# Altium PCB Copy of CAN_ESP.PcbDoc (part 1 of 2)
Units mm, origin at the board's own origin, x right, y up, seen from the top; angles counter-clockwise.
Board outline 43.47 x 32.7 mm, 2 copper layers (Top Layer, Bottom Layer), stack 1.1 mm thick; 66 components, 64 nets, 253 pads, 221 vias.
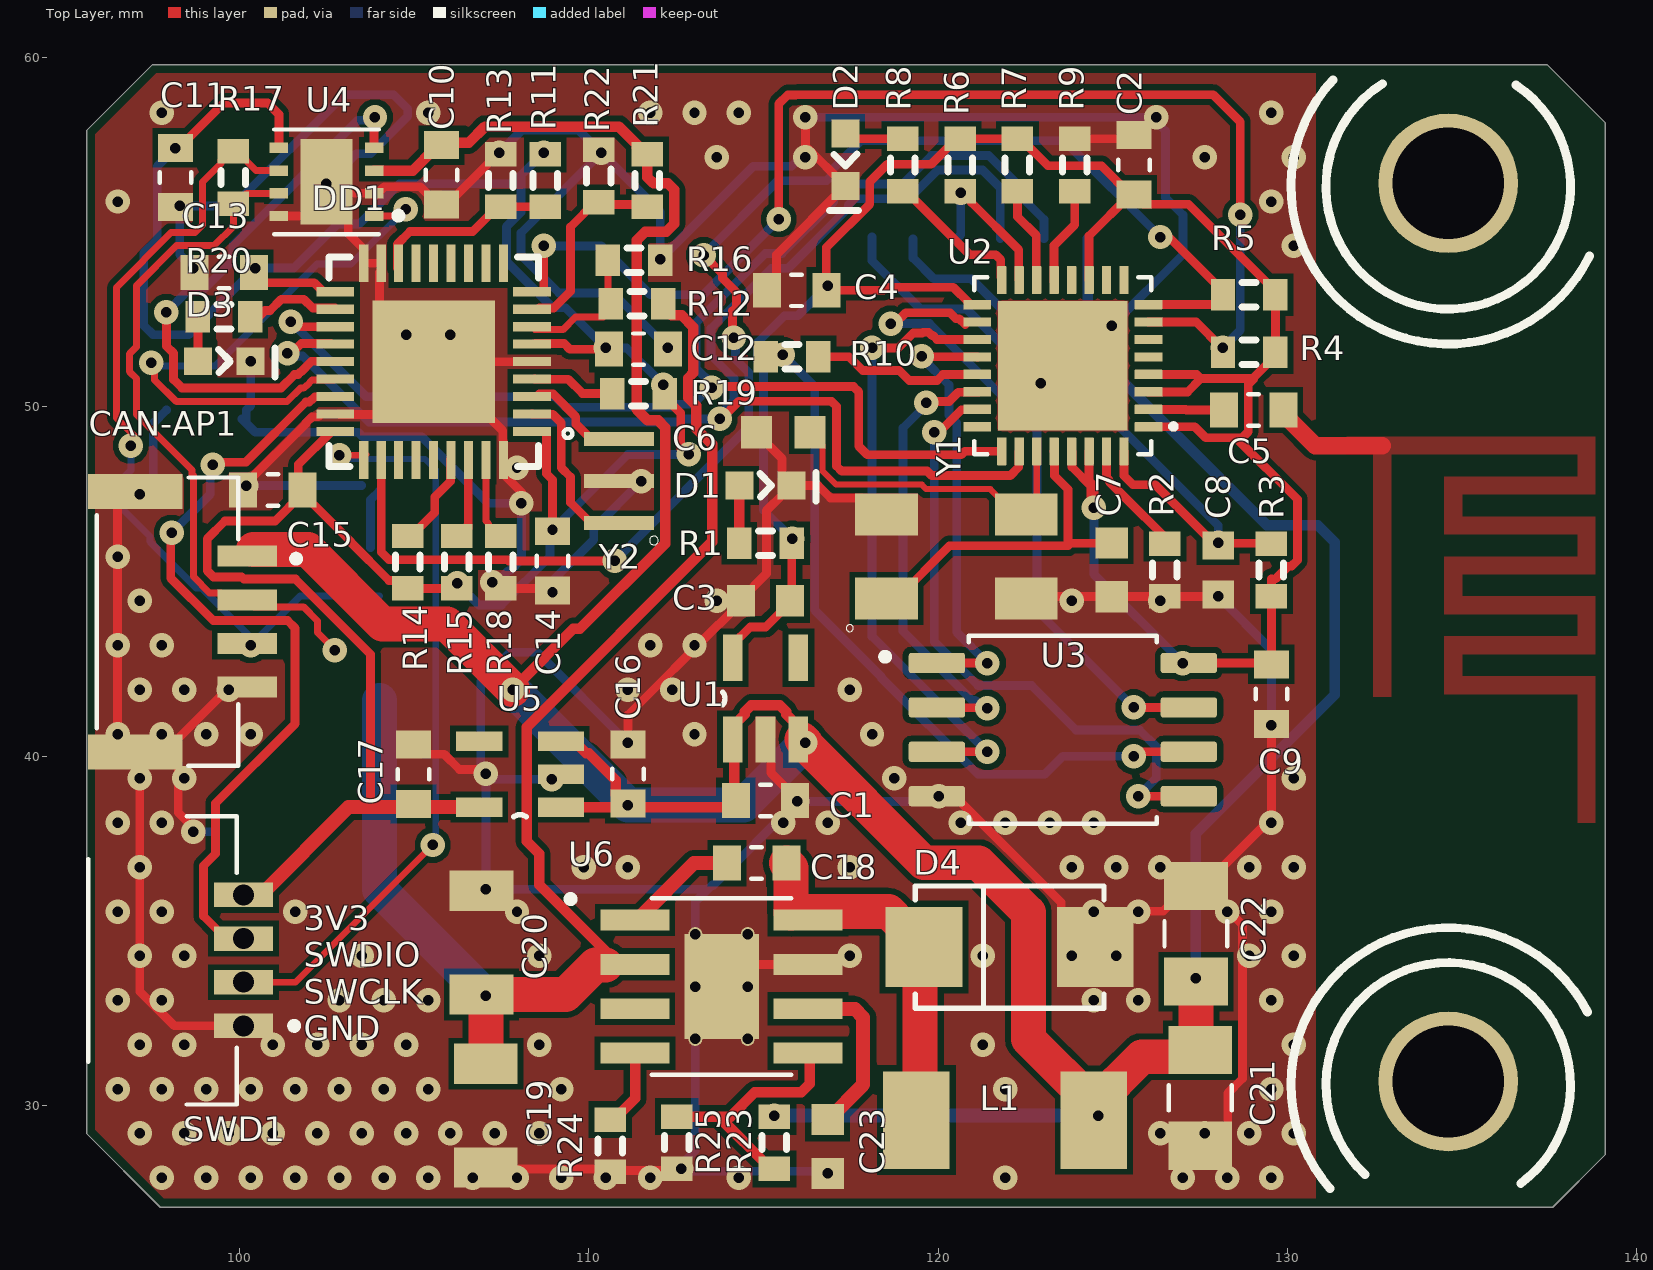
[diagram p0: Top Layer view]
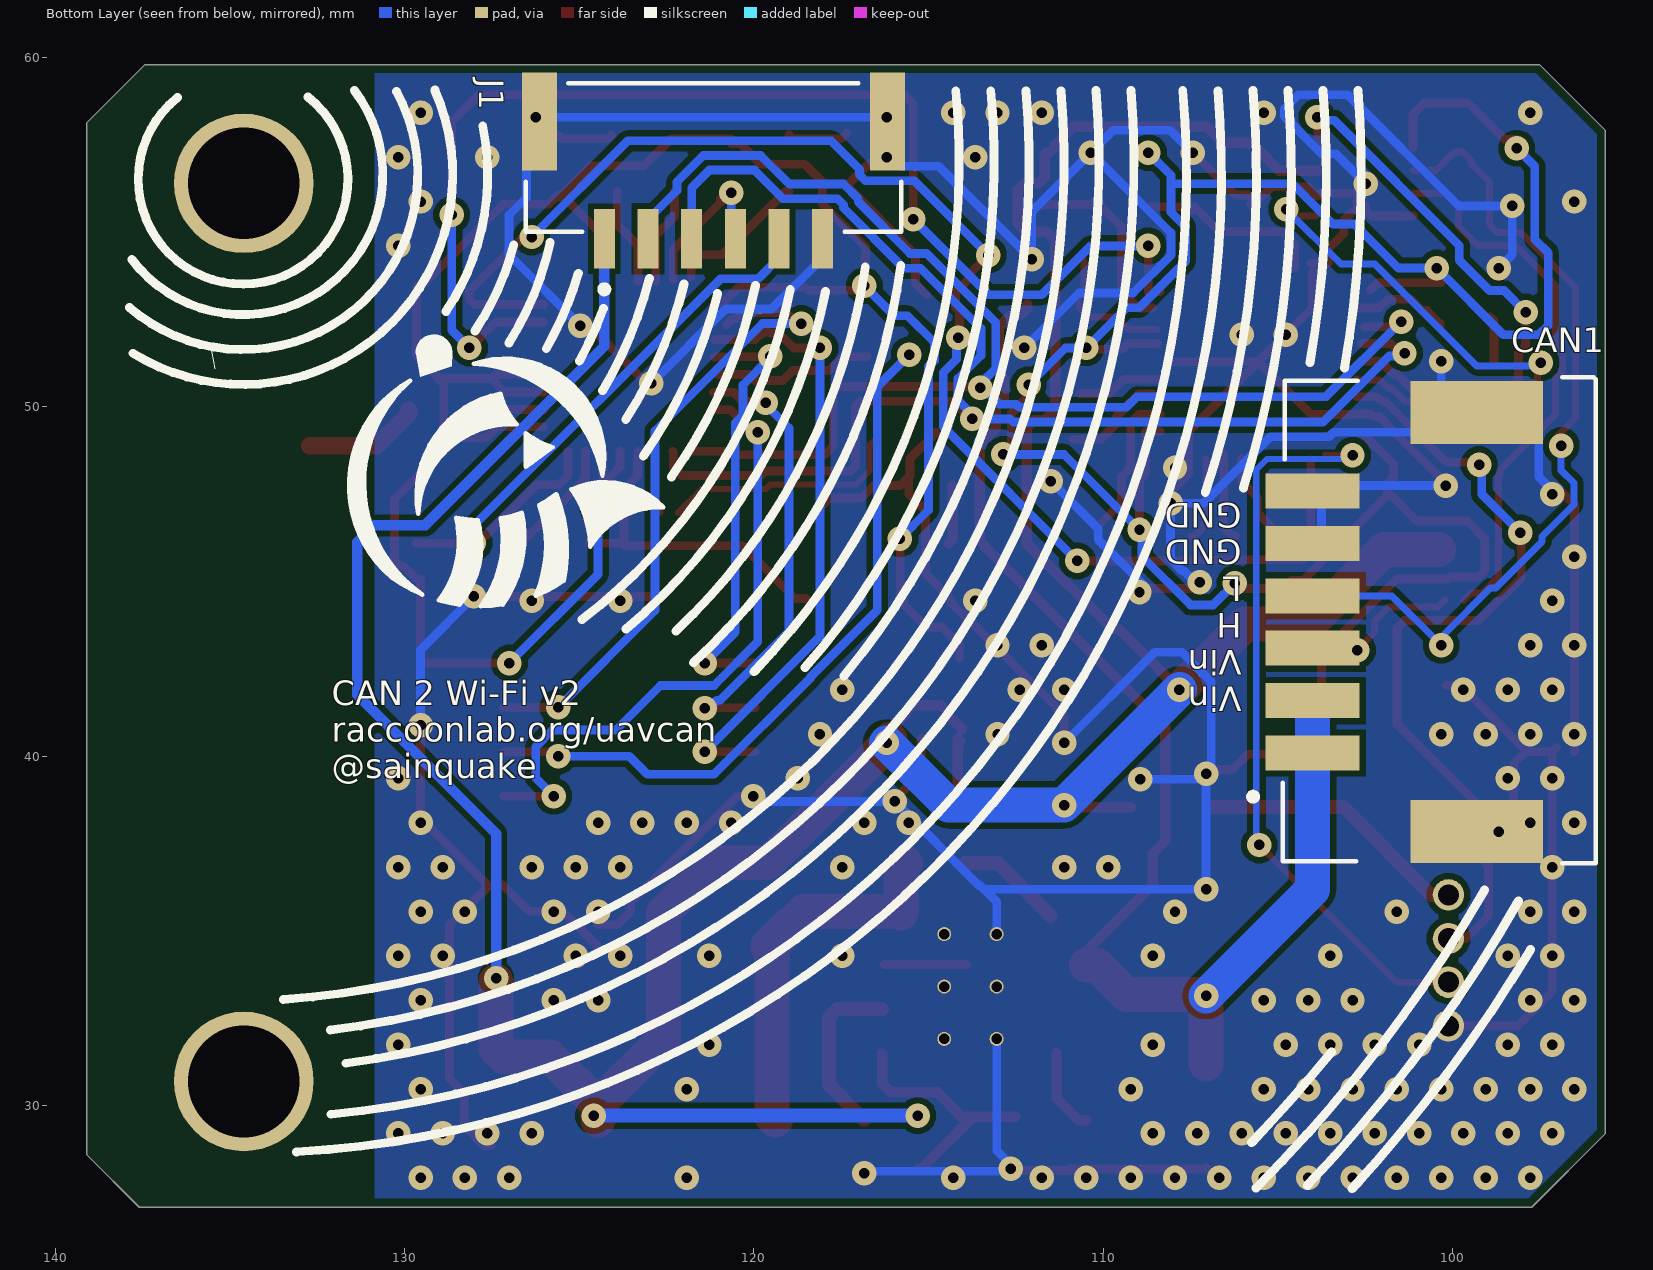
[diagram p1: Bottom Layer view, seen from below]

## Layer stack, top to bottom
Top Solder: solder mask 0.0102, Solder Resist, Dk 3.5
Top Layer: signal copper 0.05
Dielectric 1: dielectric 1, FR-4, Dk 4.8
Bottom Layer: signal copper 0.05
Bottom Solder: solder mask 0.0102, Solder Resist, Dk 3.5

## Board outline
95.631,29.21 95.631,57.912 97.519,59.8 137.431,59.8 139.1,58.131 139.1,28.61 137.59,27.1 97.741,27.1

## Design rules (kind name [scope] priority, off if disabled: settings)
BoardOutlineClearance [All] p1: gap=0.25 ignorepadtopadclearanceinfootprint=FALSE
Clearance [All] p1: gap=0.17 ignorepadtopadclearanceinfootprint=FALSE
ComponentClearance [All] p1: gap=0.254 collisioncheckmode=3 verticalgap=2540 showdistances=FALSE
FanoutControl Fanout_SOIC [IsSOIC] p3: bgadir=Out bgaviamode=Closest fanoutstyle=Auto fanoutdirection=Alternating viagrid=0.025 // Fanout_SOIC (Default Rule)
FanoutControl Fanout_Small [(CompPinCount < 5)] p4: bgadir=Out bgaviamode=Closest fanoutstyle=Auto fanoutdirection=OutThenIn viagrid=0.025 // Fanout_Small (Default Rule)
FanoutControl Fanout_Default [All] p5: bgadir=In bgaviamode=Closest fanoutstyle=Auto fanoutdirection=Alternating viagrid=0.025 // Fanout_Default (Default Rule)
HoleSize [All] p1: absolutevalues=TRUE maxlimit=4.5 minlimit=0.3 maxpercent=80.000 minpercent=20.000
HoleToHoleClearance [All] p1: gap=0.4 allowstackedmicrovias=TRUE
MinimumSolderMaskSliver [All] p1: minsoldermaskwidth=0.15
PlaneClearance [All] p1: clearance=0.2
PlaneConnect [All] p1: planeconnectstyle=Relief reliefexpansion=0.5 reliefentries=4 reliefconductorwidth=0.2 reliefairgap=0.25
PolygonConnect PolygonConnect_1 [InNet('GND')] p1: connectstyle=Direct reliefconductorwidth=0.254 reliefentries=4 polygonreliefangle="90 Angle" airgapwidth=0.254
PolygonConnect [All] p2: connectstyle=Relief reliefconductorwidth=0.3 reliefentries=4 polygonreliefangle="90 Angle" airgapwidth=0.16
RoutingCorners [All] p1: cornerstyle=45-Degree minsetback=2.5 maxsetback=2.5
RoutingPriority [All] p1 off: routingpriority=0
RoutingVias [All] p1: holewidth=0.3 width=0.7 viastyle="Through Hole" minholewidth=0.3 minwidth=0.7 maxholewidth=0.8 maxwidth=1.2
SilkToSilkClearance [All] p1: silktosilkclearance=0
SilkToSolderMaskClearance [IsPad] p1: minsilkscreentomaskgap=0 clearancetoexposedcopper=TRUE
SolderMaskExpansion [All] p1: expansion=0.1 istentingtop=FALSE
Width [All] p1: maxlimit=5 minlimit=0.17 preferedwidth=0.3
17 further rules are at their usual default settings.

## Classes and differential pairs
component class STM32F103T8: C10 C11 C12 C13 C14 C15 C16 C17 D3 DD1 R11 R12 R13 R14 R15 R16 R17 R18 R19 R20 R21 R22 SWD1 U4 U5 Y2
component class DCDC-LMR16030: C18 C19 C20 C21 C22 C23 D4 L1 R23 R24 R25 U6
component class sESP: C1 C2 C3 C4 C5 C6 C7 C8 C9 CAN1 CAN-AP1 D1 D2 J1 R1 R2 R3 R4 R5 R6 R7 R8 R9 R10 U1 U2 U3 Y1

## Components (designator, comment, footprint, x,y, rotation, side; value= is the part's Value field where it differs from the comment)
C1 "GX035C104MAT2-500" *CAPC1608X90 115.062,38.735 r0 top value=0.1u
C2 "GX035C104MAT2-500" *CAPC1608X90 125.603,56.927 r90 top value=0.1u
C3 "Cap Semi" 1608[0603] 115.062,44.45 r180 top value=1u
C4 "GX035C104MAT2-500" *CAPC1608X90 115.951,53.34 r180 top value=0.1u
C5 "GX035C104MAT2-500" *CAPC1608X90 129.032,49.911 r180 top value=5.6p
C6 "GRM1885C2A150JA01J" *CAPC1608X90N 115.57,49.276 r180 top value=15p
C7 "GRM1885C2A150JA01J" *CAPC1608X90N 124.968,45.339 r90 top value=15p
C8 "Cap Semi" 1608[0603] 128.016,45.339 r270 top value=1u
C9 "GX035C104MAT2-500" *CAPC1608X90 129.54,41.783 r270 top value=0.1u
C10 "GX035C104MAT2-500" *CAPC1608X90 105.791,56.642 r270 top value=0.1u
C11 "GX035C104MAT2-500" *CAPC1608X90 98.18,56.567 r270 top value=0.1u
C12 "GX035C104MAT2-500" *CAPC1608X90 111.427,51.653 r0 top value=0.1u
C13 "GX035C104MAT2-500" *CAPC1608X90 99.568,53.848 r180 top value=0.1u
C14 "GX035C104MAT2-500" *CAPC1608X90 108.966,45.593 r270 top value=0.1u
C15 "GX035C104MAT2-500" *CAPC1608X90 100.965,47.625 r180 top value=0.1u
C16 "GX035C104MAT2-500" *CAPC1608X90 111.125,39.497 r90 top value=0.1u
C17 "GX035C104MAT2-500" *CAPC1608X90 104.989,39.488 r90 top value=0.1u
C18 "GX035C104MAT2-500" *CAPC1608X90 114.808,36.945 r180 top value=0.1u
C19 "GRM31CR71H225KA88L" *CAP3216X125N 107.061,29.718 r270 top value=2.2u
C20 "GRM31CR71H225KA88L" *CAP3216X125N 106.934,34.671 r90 top value=2.2u
C21 "GRM31CR61A476KE15L" *CAPC3216X125N 127.508,30.226 r90 top value=47u
C22 "GRM31CR61A476KE15L" *CAPC3216X125N 127.381,34.925 r270 top value=47u
C23 "GRM188R71C105KA12D" CAPC1608X90N 116.84,28.837 r90 top value=1u
CAN1 "502585-0670" MOLEX_502585-0670 103.814,43.846 r90 bottom
CAN-AP1 "SM04B-GHS-TB(LF)(SN)-" JST_SM04B-GHS-TB(LF)(SN)- 97.953,43.857 r270 top
D1 "0603-LED-BLUE" *LEDM1608X80_LTE-C1906R-14(Primary) 115.062,47.752 r180 top
D2 "0603-LED-BLUE" *LEDM1608X80_LTE-C1906R-14(Primary) 117.348,57.077 r90 top
D3 "0603-LED-BLUE" *LEDM1608X80_LTE-C1906R-14(Primary) 99.568,51.308 r180 top
D4 "SK56" *SMB_P6SMB62AT3G(Primary) 122.047,34.544 r180 top
DD1 "STM32F103T8" *QFN50P600X600X100-37N 105.564,51.296 r180 top
J1 "BM06B-GHS-TBT(LF)(SN)(N)" *JST_BM06B-GHS-TBT(LF)(SN)(N)_BM06B-GHS-TBT(LF)(SN)(N)(Primary) 121.158,58.166 r0 bottom
L1 "IHLP2020BZER100M01" IHLP 121.92,29.591 r180 top
R1 "Res3" J1-0603 115.062,46.101 r0 top value=4.7k
R2 "RC0603FR-0710KL" J1-0603 126.492,45.339 r270 top value=12k
R3 "Res3" J1-0603 129.54,45.339 r270 top value=10k
R4 "Res3" J1-0603 128.905,51.562 r0 top value=10k
R5 "Res3" J1-0603 128.905,53.213 r0 top value=10k
R6 "Res3" J1-0603 120.63,56.927 r270 top value=10k
R7 "Res3" J1-0603 122.271,56.927 r270 top value=10k
R8 "Res3" J1-0603 118.989,56.927 r90 top value=330
R9 "Res3" J1-0603 123.912,56.927 r90 top value=10k
R10 "Res3" J1-0603 115.824,51.435 r180 top value=330
R11 "Res3" J1-0603 108.76,56.479 r90 top value=4.7k
R12 "Res3" J1-0603 111.379,52.959 r0 top value=180k
R13 "Res3" J1-0603 107.49,56.479 r270 top value=200
R14 "Res3" J1-0603 104.823,45.557 r270 top value=4.7k
R15 "Res3" J1-0603 106.22,45.557 r270 top value=4.7k
R16 "Res3" J1-0603 111.3,54.193 r180 top value=10k
R17 "Res3" J1-0603 99.831,56.567 r270 top value=120
R18 "Res3" J1-0603 107.49,45.557 r90 top value=4.7k
R19 "Res3" J1-0603 111.427,50.383 r180 top value=4.7k
R20 "Res3" J1-0603 99.568,52.578 r180 top value=330
R21 "Res3" J1-0603 111.681,56.479 r90 top value=4.7k
R22 "Res3" J1-0603 110.284,56.606 r270 top value=4.7k
R23 "Res3" J1-0603 115.316,28.944 r90 top value=56k
R24 "Res3" J1-0603 110.617,28.857 r90 top value=56k
R25 "RC0603FR-0710KL" J1-0603 112.522,28.944 r90 top value=10k
SWD1 "BM04B-GHS-TBT(LF)(SN)(N)" JST_BM04B-GHS-holes 96.774,34.163 r270 top
U1 "SPX3819M5-L-3-3/TR" *SOT95P280X145-5N 115.062,41.656 r90 top value=3V3
U2 "ESP8266EX" QFN50P500X500X80-33N 123.571,51.181 r180 top
U3 "W25Q16BVSSIG" SOIC127P790X216-8N 123.571,40.767 r0 top
U4 "TJA1042" SOT782-1 102.498,56.44 r90 top
U5 "SPX3819M5-L-3-3/TR" *SOT95P280X145-5N 108.037,39.488 r180 top value=3V3
U6 "LMR16030SDDAR" "*SOIC127P600X170-9N - duplicate" 113.804,33.413 r0 top
Y1 "ABM3B-8.000MHZ-B2-T" OSCSC500X320X110-4N 120.523,45.72 r90 top
Y2 "CSTCE8M00G55-R0" *OSC_CSTCE8M00G55-R0 110.871,47.879 r90 top

## Footprints (in the part's own frame and the unit in brackets; to place one, negate y for a bottom-side part, rotate by r counter-clockwise, add the part's x,y. Pads: shape width x height; smd on the part's side, far side on the other; paste and mask are expansions set on the pad)
1608[0603] [mm] "Chip Capacitor, Body 1.6x0.8mm, IPC High Density"
  rect 0.8x0.9 smd: 1(-0.7,0) 2(0.7,0)
  body extent -0.87,-0.48 0.87,0.48, height 1.3
*CAP3216X125N [mm]
  rect 1.15x1.82 smd: 1(-1.485,0) 2(1.485,0)
  body extent -1.6,-0.8 1.6,0.8, height 1.22
*CAPC1608X90 [mm]
  rect 0.8x1 smd: 1(-0.85,0) 2(0.85,0)
  silkscreen extent -0.15,-0.45 0.15,0.45, body extent -0.8,-0.4 0.8,0.41, height 0.88
*CAPC1608X90N [mm]
  rect 0.89x0.93 smd: 1(-0.77,0) 2(0.77,0)
  body extent -0.8,-0.4 0.8,0.41, height 0.88
*CAPC3216X125N [mm]
  rect 1.38x1.82 smd: 1(-1.369,0) 2(1.369,0)
  silkscreen extent -0.36,-0.9 0.36,0.9, body extent -1.6,-0.87 1.6,0.87, height 1.71
*JST_BM06B-GHS-TBT(LF)(SN)(N)_BM06B-GHS-TBT(LF)(SN)(N)(Primary) [mm]
  rect 0.6x1.7 smd: 1(3.125,3.35) 2(1.875,3.35) 3(0.625,3.35) 4(-0.625,3.35) 5(-1.875,3.35) 6(-3.125,3.35)
  rect 1x2.8 smd: S1(-4.975,0) S2(4.975,0)
  silkscreen extent -5.37,-1.1 5.37,4.9, body extent -5.37,-1.1 5.38,3.85, height 3.88
*LEDM1608X80_LTE-C1906R-14(Primary) [mm]
  rect 0.8x0.8 smd: A(0.75,0) C(-0.75,0)
  silkscreen extent -1.45,-0.38 0.16,0.45, body extent -0.8,-0.3 0.8,0.3, height 1.15
*OSC_CSTCE8M00G55-R0 [mm]
  rect 0.4x2 smd: 1(-1.2,0) 2(0,0) 3(1.2,0)
  silkscreen extent -1.83,-1.13 -1.57,-0.87, body extent -1.6,-0.65 1.6,0.65, height 1
*QFN50P600X600X100-37N [mm]
  rect 1.08x0.26 smd: 1(-2.815,2) 2(-2.815,1.5) 3(-2.815,1) 4(-2.815,0.5) 5(-2.815,0) 6(-2.815,-0.5) 7(-2.815,-1) 8(-2.815,-1.5) 9(-2.815,-2) 19(2.815,-2) 20(2.815,-1.5) 21(2.815,-1) 22(2.815,-0.5) 23(2.815,0) 24(2.815,0.5) 25(2.815,1) 26(2.815,1.5) 27(2.815,2)
  rect 0.26x1.08 smd: 10(-2,-2.815) 11(-1.5,-2.815) 12(-1,-2.815) 13(-0.5,-2.815) 14(0,-2.815) 15(0.5,-2.815) 16(1,-2.815) 17(1.5,-2.815) 18(2,-2.815) 28(2,2.815) 29(1.5,2.815) 30(1,2.815) 31(0.5,2.815) 32(0,2.815) 33(-0.5,2.815) 34(-1,2.815) 35(-1.5,2.815) 36(-2,2.815)
  rect 3.5x3.5 smd: 36(0,0)
  silkscreen extent -3.97,-3 3,3, body extent -3,-3 3,3, height 1
*SMB_P6SMB62AT3G(Primary) [mm]
  rect 2.2x2.3 smd: A(-2.45,0) C(2.45,0)
  silkscreen extent -2.7,-1.75 2.7,1.75, body extent -2.72,-1.78 2.72,1.78, height 2.49
"*SOIC127P600X170-9N - duplicate" [mm]
  rect 1.97x0.6 smd: 1(-2.475,1.905) 2(-2.475,0.635) 3(-2.475,-0.635) 4(-2.475,-1.905) 5(2.475,-1.905) 6(2.475,-0.635) 7(2.475,0.635) 8(2.475,1.905)
  round 0.4 hole 0.3: 9(-0.75,-1.5) 9(-0.75,0) 9(-0.75,1.5) 9(0.75,-1.5) 9(0.75,0) 9(0.75,1.5)
  rect 2.13x3 smd: 9(0,0)
  silkscreen extent -4.42,-2.52 2,2.6, body extent -3,-2.45 3,2.45, height 1.69
*SOT95P280X145-5N [mil]
  rect 52x22 smd: 1(-46,37) 2(-46,0) 3(-46,-37) 4(46,-37) 5(46,37)
  silkscreen extent -7,46 7,48, body extent -55,-57 55,57, height 57
CAPC1608X90N [mm]
  rect 0.89x0.93 smd: 1(-0.77,0) 2(0.77,0)
  body extent -0.8,-0.4 0.8,0.4, height 0.9
IHLP [mil]
  rect 75x110 smd: 1(-100,0) 2(100,0)
  body extent -100,-100 100,100, height 79
J1-0603 [mm] "Chip Resistor, Body 1.6x0.8mm, IPC High Density"
  rect 0.7x0.9 smd: 1(-0.75,0) 2(0.75,0)
  silkscreen extent -0.2,-0.35 0.2,0.35, body extent -0.85,-0.48 0.85,0.48, height 0.9
JST_BM04B-GHS-holes [mm]
  rect 0.7x1.7 / inner rect 0.6x1.7 / far side round 0.9 hole 0.6: 1(1.875,3.35) 2(0.625,3.35) 3(-0.625,3.35) 4(-1.875,3.35)
  silkscreen extent -4.13,-1.1 4.13,4.9, body extent -4.12,-1.02 4.12,3.93, height 4.15
JST_SM04B-GHS-TB(LF)(SN)- [mm]
  rect 0.6x1.7 smd: 1(-1.875,2.275) 2(-0.625,2.275) 3(0.625,2.275) 4(1.875,2.275)
  rect 1x2.7 smd: SH1(-3.725,-0.925) SH2(3.725,-0.925)
  silkscreen extent -4.13,-2.02 4.13,3.77, body extent -4.06,-2.16 4.19,2.69, height 4.35
MOLEX_502585-0670 [mm]
  rect 1x2.7 smd: 1(-3.75,0.2) 2(-2.25,0.2) 3(-0.75,0.2) 4(0.75,0.2) 5(2.25,0.2) 6(3.75,0.2)
  rect 1.8x3.8 smd: P1(-6,-4.5) P2(6,-4.5)
  silkscreen extent -6.9,-7.9 7,2, body extent -6.65,-7.68 6.65,0.82, height 6.41
OSCSC500X320X110-4N [mm]
  rect 1.2x1.8 smd: 1(-1.2,2) 2(-1.2,-2) 3(1.2,-2) 4(1.2,2)
  silkscreen extent -2.15,2.95 -1.95,3.15, body extent -1.6,-1.25 1.6,1.25, height 1
QFN50P500X500X80-33N [mm]
  rrect15% 0.8x0.27 smd: 1(-2.45,1.75) 2(-2.45,1.25) 3(-2.45,0.75) 4(-2.45,0.25) 5(-2.45,-0.25) 6(-2.45,-0.75) 7(-2.45,-1.25) 8(-2.45,-1.75) 17(2.45,-1.75) 18(2.45,-1.25) 19(2.45,-0.75) 20(2.45,-0.25) 21(2.45,0.25) 22(2.45,0.75) 23(2.45,1.25) 24(2.45,1.75)
  rrect15% 0.27x0.8 smd: 9(-1.75,-2.45) 10(-1.25,-2.45) 11(-0.75,-2.45) 12(-0.25,-2.45) 13(0.25,-2.45) 14(0.75,-2.45) 15(1.25,-2.45) 16(1.75,-2.45) 25(1.75,2.45) 26(1.25,2.45) 27(0.75,2.45) 28(0.25,2.45) 29(-0.25,2.45) 30(-0.75,2.45) 31(-1.25,2.45) 32(-1.75,2.45)
  rect 3.7x3.7 smd paste-3: 33(0,0)
  silkscreen extent -3.24,-2.53 2.53,2.53, body extent -2.5,-2.5 2.5,2.5, height 0.9
SOIC127P790X216-8N [mm]
  rrect25% 1.61x0.58 smd: 1(-3.605,1.905) 2(-3.605,0.635) 3(-3.605,-0.635) 4(-3.605,-1.905) 5(3.605,-1.905) 6(3.605,-0.635) 7(3.605,0.635) 8(3.605,1.905)
  silkscreen extent -5.18,-2.69 2.69,2.69
SOT782-1 [mm]
  rect 0.3x0.525 smd: 1(-0.975,-1.362) 2(-0.325,-1.362) 3(0.325,-1.362) 4(0.975,-1.362) 5(0.975,1.363) 6(0.325,1.363) 7(-0.325,1.363) 8(-0.975,1.363)
  rect 2.45x1.5 smd paste-2: 8(0,0)
  silkscreen extent -1.5,-2.16 1.5,1.5, body extent -1.52,-1.52 1.52,1.52, height 0.85

## Part data
C1 C2 C4 C5 C9 C10 C11 C12 C13 C14 C15 C16 C17 C18: "Cap Thin Film 0.1uf 50v 0603", Package="0603 AVX", MF=AVX, Pacage Metric=1608, SnapEDA_Link=https://www.snapeda.com/parts/GX035C104MAT2-500/AVX/view-part/?ref=snap, Type=SMD
  C1 C2 C10 C11 C12 C13 C14 C15 C16 C17: MP=GX035C104MAT2-500
  C4 C5 C9 C18: MP="GX035C104MAT2-500 or CL10B104JB8NNNC"
C3 C8: "Capacitor (Semiconductor SIM Model)", LatestRevisionDate=29-May-2009, LatestRevisionNote="IPC-7351 Footprint Added.", PackageDescription="Chip Capacitor", PackageReference=C1206, Published=8-Jun-2000, Publisher="Altium Limited"
C19 C20: "1206 2.2 uF 50 V В±10% Tolerance X7R SMT Multilayer Ceramic Capacitor", Package="1206 Murata", MF="Murata Electronics", MP=GRM31CR71H225KA88L, SnapEDA_Link=https://www.snapeda.com/parts/GRM31CR71H225KA88L/Murata%20Electronics%20North%20America/view-part/?ref=snap, Type=SMD
C21 C22: "Multilayer Ceramic Capacitor, GRM Series, 47 - F, - 10%, X5R, 10 V, 1206 [3216 Metric]", Package="1206 Murata Electronics", MF="Murata Electronics", MP=GRM31CR61A476KE15L, SnapEDA_Link=https://www.snapeda.com/parts/GRM31CR61A476KE15L/Murata%20Electronics%20North%20America/view-part/?ref=snap, Type=SMD
C23: "SMD Capacitor X7R(EIA) with Capacitance: 1.0uF Tol. 10%. Rated Voltage: 16Vdc", Package=0603, ChipDip_Link=https://www.chipdip.ru/product/grm188r71c105ka12d, HelpURL=https://static.chipdip.ru/lib/428/DOC005428493.pdf, MF="Murata Electronics", MP=GRM188R71C105KA12D, Pacage Metric=1608, SnapEDA_Link=https://www.snapeda.com/parts/GRM188R71C105KA12D/Murata%20Electronics%20North%20America/view-part/228340/?ref=snap, Type=SMD
CAN1: "1.50mm Pitch, CLIK-Mate PCB Receptacle, Single Row, Surface Mount, Right-Angle, Tin Plating, Positive Lock, 6 Circuits, Natural", Package=None, MF=Molex, MP=502585-0670, SnapEDA_Link=https://www.snapeda.com/parts/502494-0670/Molex/view-part/?ref=snap, System=Connector, Type=SMD
CAN-AP1: "Connector Header Surface Mount, Right Angle 4 position 0.049 _1.25mm_", Package=None, ChipDip_Link=https://www.chipdip.ru/product/sm04b-ghs-tb-lf-sn-gh-1.25mm-header-side-ent, HelpURL=http://www.farnell.com/datasheets/2082975.pdf, MF="JST Sales", MP=SM04B-GHS-TB(LF)(SN), SnapEDA_Link=https://www.snapeda.com/parts/SM04B-GHS-TB%28LF%29%28SN%29-/JST%20Sales%20America%20Inc./view-part/2759740/?ref=snap, System=Connector
D1 D2 D3: library part LTE-C1906R-14, "LED IrLED Chip LED 2-Pin SMD T/R", Package="0603 Lite-On", MP=0603-LED-BLUE, SnapEDA_Link=https://www.snapeda.com/parts/LTE-C1906R-14/Lite-On%20Inc./view-part/?ref=snap, Type=SMD
D4: "Диод Шоттки 5А 60В [SMB / DO-214AA]", Package="DO-214 Littelfuse", ChipDip_Link=https://www.chipdip.ru/product/sk56, MF="Littelfuse Inc.", MP=SK56, SnapEDA_Link=https://www.snapeda.com/parts/P6SMB62AT3G/Littelfuse%20Inc./view-part/?ref=snap, Type=SMD
DD1: "STM32F103T8U6, Микроконтроллер 32BIT ARM 64K FLASH [VFQFPN-36]", Package=VFQFPN-36, ChipDip_Link=https://www.chipdip.ru/product/stm32f103t8u6-2, HelpURL=http://www.st.com/stonline/products/literature/ds/13587.pdf, MF=STM, MP=STM32F103T8U6, SnapEDA_Link=https://www.snapeda.com/parts/STM32F103T8U6TR/STMicroelectronics/view-part/?ref=search&t=STM32F103T8U6, Type=SMD
J1: "Conn Header Gh Top 6pos 1.25mm", Package=None, Availability=Unavailable, MF="JST Sales", MP=BM06B-GHS-TBT_LF__SN__N_, Price=None, SnapEDA_Link=https://www.snapeda.com/parts/BM06B-GHS-TBT%28LF%29%28SN%29%28N%29/JST%20Sales%20America%20Inc./view-part/?ref=snap
L1: "10ÂµH Shielded Molded Inductor 2.3A 199mOhm Max Nonstandard", Package="Nonstandard Vishay", ChipDip_Link=https://www.chipdip.ru/product/ihlp2020bzer100m11-inductor-ihlp-smd-2020-10, HelpURL=http://www.vishay.com/docs/34253/ihlp-2020bz-01.pdf, MF="Vishay Dale", MP=IHLP2020BZER100M01, SnapEDA_Link=https://www.snapeda.com/parts/IHLP2020BZER100M01/Vishay%20Dale/view-part/44808/?ref=snap, Type=SMD
R1 R3 R4 R5 R6 R7 R8 R9 R10 R11 R12 R13 R14 R15 R16 R18 R19 R20 R21 R22 R23 R24: "Resistor", Package=R0603, Pacage Metric=1608, Type=SMD
  R1 R11 R13 R14 R15 R16 R18 R19 R21 R22: ChipDip_Link=https://www.chipdip.ru/product0/9000079736, HelpURL=https://www.chipdip.ru/product0/9000079736, MP="4.7K 1% 0603"
  R3 R4 R5 R6 R7 R9: ChipDip_Link=https://www.chipdip.ru/product0/9000079736, HelpURL=https://www.chipdip.ru/product0/9000079736, MP="10K 1% 0603"
  R8 R10 R20: ChipDip_Link=https://www.chipdip.ru/product0/9000079628, HelpURL=https://www.chipdip.ru/product0/9000079628, MP=RC0603FR-07330RL
  R12: MP="180K 1% 0603"
  R23 R24: ChipDip_Link=https://www.chipdip.ru/product0/9000079754, HelpURL=https://www.chipdip.ru/product0/9000079754, MP=RC0603FR-0756KL
R2 R25: "10 kOhms 1 0.1 W 1 10 W Chip Resistor 0603 1608 Metric Thick Film", Package=R0603, ChipDip_Link=https://www.chipdip.ru/product0/9000079736, HelpURL=https://www.chipdip.ru/product0/9000079736, MF="Yageo or NXP", MP="10K 1% 0603", Pacage Metric=1608, SnapEDA_Link=https://www.snapeda.com/parts/RC0603FR-0710KL/Yageo/view-part/?ref=dk&t=RC0603FR-0710KL&con_ref=None, Type=SMD
R17: "120 Ohms 1 0.1 W 1 10 W Chip Resistor 0603 1608 Metric Thick Film", Package=R0603, ChipDip_Link=https://www.chipdip.ru/product0/9000079618, HelpURL=https://www.chipdip.ru/product0/9000079618, MP=RC0603FR-07120RL, Pacage Metric=1608, Type=SMD
SWD1: "Conn Shrouded Header HDR 4 POS 1.25mm Solder ST SMD Reel", Package=None, Instructions="Do not install", MF="JST Sales", MP=SM04B-GHS-TB(LF)(SN), SnapEDA_Link=https://www.snapeda.com/parts/BM04B-GHS-TBT%28LF%29%28SN%29%28N%29/JST%20Sales%20America%20Inc./view-part/?ref=snap, System=Connector, Type=SMD
U1 U5: library part SPX3819M5-L, "Low Dropout Voltage Regulator, Adjustable 0.5A, В±1%, 2.5 to 16 Vin, 5-Pin SOT-23", Package="SOT-23-5 Exar", ChipDip_Link=https://www.chipdip.ru/product1/8003455237, HelpURL=http://www.farnell.com/datasheets/2614478.pdf, MF="MaxLinear, Inc.", MP=SPX3819M5-L-3-3/TR, SnapEDA_Link=https://www.snapeda.com/parts/SPX3819M5-L/MaxLinear%2C%20Inc./view-part/?ref=snap, Type=SMD
U2: "IC RF TxRx + MCU WiFi 802.11b/g/n 2.4GHz 32-VFQFN Exposed Pad", Package="VFQFN-32 Espressif Systems", Availability=Warning, Check_prices=https://www.snapeda.com/parts/ESP8266EX/Espressif%20Systems/view-part/555861/?ref=eda, MF="Espressif Systems", MP=ESP8266EX, Price=None, Purchase-URL=https://pricing.snapeda.com/search/part/ESP8266EX/?ref=eda, SnapEDA_Link=https://www.snapeda.com/parts/ESP8266EX/Espressif%20Systems/view-part/555861/?ref=snap
U3: "Flash, pin, soic, flash, Memory, Semiconductors and Actives, serial, ic", Package=None, Availability=Unavailable, MF="{'manufacturer': u'Winbond'}", MP=W25Q16BVSSIG, Price=None
U4: "1/1 Transceiver Half CANbus 8-SO", Package="VDFN-8 NXP USA", ChipDip_Link=https://www.chipdip.ru/product1/8002840332, HelpURL=https://static.chipdip.ru/lib/583/DOC001583059.pdf, MF="NXP USA", MP=TJA1042, SnapEDA_Link=https://www.snapeda.com/parts/TJA1042/NXP%20USA%20Inc./view-part/900919/?ref=snap, Type=SMD
U6: "LMR16030SDDAR, Conv DC-DC 4.3V to 60V Step Down Single-Out 1V to 50V 3A Automotive 8-Pin HSOP EP T/R", Package="PowerSOIC-8 Texas Instruments", ChipDip_Link=https://www.chipdip.ru/product1/8003448566, HelpURL=https://www.ti.com/lit/ds/symlink/lmr16030.pdf, MF="Texas Instruments", MP=LMR16030SDDAR, SnapEDA_Link=https://www.snapeda.com/parts/TPS54560DDA/Texas%20Instruments/view-part/?ref=snap, Type=SMD
Y1: "Crystal 8MHz В±20ppm (Tol) В±50ppm (Stability) 18pF FUND 200Ohm 4-Pin CSMD T/R", Package=None, Availability=Unavailable, MF="{'manufacturer': u'Abracon'}", MP=ABM3B-8.000MHZ-B2-T, Price=None
Y2: "Ceramic Resonator 8MHz ??0.5% _Tol_ ??0.2% _Stability_ 33pF 40Ohm 3-Pin CSMD T/R", Package="SMD-3 Murata", ChipDip_Link=https://www.chipdip.ru/product1/8001783721, HelpURL=https://www.murata.com/en-eu/api/pdfdownloadapi?cate=&partno=CSTCE8M00G55-R0, MF=Murata, MP=CSTCE8M00G55-R0, SnapEDA_Link=https://www.snapeda.com/parts/CSTCE8M00G55-R0/Murata%20Electronics%20North%20America/view-part/?ref=snap, Type=SMD
C6 C7: ChipDip_Link=https://www.chipdip.ru/product/grm1885c2a150j, HelpURL=https://static.chipdip.ru/lib/428/DOC005428493.pdf, SnapEDA_Link=https://www.snapeda.com/parts/GRM1885C2A150JA01J/Murata/view-part/1812122/?ref=snap

## Free pads (board coordinates)
  round 4 hole 3.2: ""(134.6,30.7) ""(134.6,56.4)

## Via types
v1: diameter 0.7, hole 0.3, Top Layer to Bottom Layer, tented both sides, 221 vias

## Nets (pads, with @x,y where several pads share a name; then routed paths per layer and width w, separated by ;. In a path a pad name is that pad's centre, name@x,y a point inside that pad or via, vN(x,y) a via of type N, cw(c..) or ccw(c..) an arc to the next point about the centre after c; other vN are vias at no path point)
3.3: C11.1 C12.1 C13.1 C14.1 C15.1 C17.1 DD1.1 DD1.6 DD1.19 DD1.27 R11.2 R14.2 R15.2 R19.1 SWD1.4 U4.5 U5.5 | length 80.4
  Top Layer w0.25: v1(98.171,57.404) 98.18,57.413 C11.1 ; C11.1@98.18,57.658 98.521,57.658 99.56,58.697 100.815,58.697 101.136,58.376 U4.5 ; C13.1@100.339,53.558 102.144,53.558 DD1.19@102.362,53.34 ; C15.1@101.854,47.498 101.788,47.498 101.029,46.739 99.594,46.739 99.083,46.228 99.083,45.31 99.256,45.137 100.068,45.137 100.128,45.077 101.608,45.077 103.759,42.926 103.759,38.608 ; DD1.27@102.616,49.276 101.694,48.354 101.694,48 101.872,47.822 101.872,47.468 103.189,46.151 103.189,46.131 104.287,45.032 104.622,45.032 R14.2@104.823,44.831 ; R14.2 R15.2 ; DD1.1 108.789,49.296 108.794,49.291 108.794,48.091 108.966,47.919 v1(108.966,46.482) ; DD1.6@108.458,51.816 109.299,51.816 109.461,51.653 C12.1@110.49,51.653 ; v1(112.141,50.633) 112.141,50.32 112.636,49.825 112.636,48.787 112.782,48.641 v1(112.861,48.641)
  Top Layer w0.4: SWD1.4 100.624,36.038 103.135,38.549 U5.5
  Bottom Layer w0.25: v1(98.171,57.404) 97.653,56.886 97.653,54.792 97.272,54.411 97.272,52.334 97.536,52.07 98.552,52.07 v1(100.457,53.975) 101.562,53.975 102.822,55.235 103.432,55.235 104.585,56.388 108.067,56.388 ; v1(106.234,44.954) 106.852,44.336 107.507,44.336 108.894,45.723 108.894,46.41 111.125,48.641 v1(112.861,48.641) ; v1(108.712,57.277) 108.067,56.632 108.067,56.388 ; v1@110.363,51.816 109.339,52.84 108.976,52.84 107.647,54.169 107.647,55.155 108.067,55.575 108.067,56.388 ; v1@110.617,51.689 111.085,51.689 v1(112.141,50.633)
  other v1: 110.49,51.689
3.3ESP: C2.1 C3.1 C4.1 C9.1 R1.2 R3.2 R4.2 R5.2 R6.1 R7.1 U1.5 U2.1 U2.3 U2.4 U2.11 U2.17 U2.29 U2.30 U3.8 | length 68.2
  Top Layer w0.25: U1.5 114.122,43.205 114.622,43.705 115.067,43.705 115.697,44.335 115.697,44.45 115.812,44.565 R1.2 ; C4.1 C4.1@116.801,53.428 ; v1(116.84,53.467) C4.1@116.801,53.428 ; C4.1@117.065,53.34 118.444,53.34 118.533,53.43 120.433,53.43 U2.17@120.904,52.959 ; R6.1@120.65,57.531 120.384,57.531 119.803,56.95 118.545,56.95 118.043,56.448 118.043,55.805 116.801,54.563 C4.1@116.801,53.428 ; R6.1@120.65,57.677 R7.1 122.371,57.677 123.146,56.902 124.678,56.902 C2.1@125.503,56.077 ; U2.29 123.831,48.721 123.831,48.281 124.374,47.738 124.374,47.203 v1(124.46,47.117) 124.46,47.752 124.321,47.891 U2.30 ; U2.11 124.321,54.895 C2.1@125.503,56.077 ; C2.1@125.603,56.007 125.573,56.007 C2.1@125.503,56.077 ; C2.1 125.878,55.802 127.166,55.802 129.501,53.467 R5.2@129.667,53.467 ; U2.1 127.343,49.431 127.658,49.116 128.524,49.116 ; U2.3 127.139,50.431 127.508,50.8 ; U2.4 127.405,50.931 127.519,50.817 129.01,50.817 129.667,51.474 129.667,51.562 129.655,51.574 R5.2 ; U3.8@127.381,42.672 129.501,42.672 C9.1 ; 129.032,50.8 128.877,50.645 128.877,49.289 128.704,49.116 128.524,49.116 ; C9.1@129.54,42.672 129.54,45.085 ; 129.667,45.085 130.026,45.444 130.112,45.444 130.285,45.617 130.285,47.355 128.524,49.116
  Bottom Layer w0.25: v1(115.824,46.228) 115.002,47.05 115.002,51.161 114.835,51.329 114.835,51.843 115.604,52.612 115.985,52.612 v1(116.84,53.467) ; v1(124.46,47.117) 124.46,45.212 v1(127,42.672)
5V: C1.1 C10.1 C16.1 C21.2 C22.2 CAN-AP1.1 J1.1 L1.1 R21.2 R23.2 U1.1 U1.3 U4.3 U5.1 U5.3 | length 116.2
  Top Layer w0.3: U4.3 104.964,56.765 C10.1@105.603,57.404 ; C10.1@105.811,57.512 105.856,57.557 106.565,57.557 107.035,58.026 110.867,58.026 111.381,57.512 111.381,57.429 111.534,57.277 R21.2@111.633,57.277 ; v1@107.95,42.037 109.564,43.651 109.75,43.651 112.191,46.092 112.191,49.412 111.989,49.613 111.695,49.613 111.38,49.928 111.38,54.776 111.616,55.011 112.216,55.011 112.451,55.247 112.451,56.212 112.264,56.399 111.857,56.399 111.681,56.575 R21.2 ; U5.1 114.241,38.549 C1.1@114.3,38.608 ; U5.3 109.587,40.428 109.927,40.088 109.999,40.088 110.775,39.311 110.775,38.897 111.064,38.608 v1(111.125,38.608) ; U1.1@114.046,40.767 114.046,40.792 114.463,41.209 114.463,41.281 114.65,41.468 115.474,41.468 115.661,41.281 115.661,41.209 116.002,40.869 U1.3 ; U1.1@114.088,40.428 U1.1@114.135,40.475 ; C1.1@114.167,38.741 114.167,40.443 U1.1@114.135,40.475 ; U1.1@114.173,40.513 U1.1@114.135,40.475
  Top Layer w0.4: R23.2 v1(115.316,29.718)
  Top Layer w1: CAN-AP1.1@100.412,45.916 101.967,45.916 104.096,43.787 105.946,43.787 v1(107.823,41.91) ; U1.3@116.103,40.488 v1(116.205,40.386) ; U1.3@116.222,40.327 119.593,36.957 121.158,36.957 122.583,35.532 122.583,31.913 L1.1@124.46,30.035 ; L1.1 L1.1@124.46,30.035 ; C21.2@127.381,31.623 127.163,31.405 125.83,31.405 L1.1@124.46,30.035 ; C21.2@127.381,31.75 C22.2
  Bottom Layer w0.3: J1.1 124.283,51.739 129.413,46.609 130.869,46.609 131.353,46.125 131.353,41.759 127.381,37.787 v1(127.381,33.655)
  Bottom Layer w0.4: v1(115.316,29.718) v1(124.587,29.718)
  Bottom Layer w1: v1(107.823,41.91) v1(111.125,38.608) 114.427,38.608 v1(116.205,40.386)
ADC: U2.6
ADC_5V: DD1.8 R21.1 R22.2 | length 5.5
  Top Layer w0.25: DD1.8@108.585,52.832 109.002,52.832 109.481,53.311 109.481,55.153 110.184,55.856 R22.2 110.348,55.793 111.72,55.793 R21.1@111.76,55.753
ADC_CUR: DD1.10
ADC_VIN: DD1.7 R12.1 R16.2 | length 3.9
  Top Layer w0.2: DD1.7@108.458,52.211 109.261,52.211 109.624,52.573 110.427,52.573 110.677,52.823 R12.1@110.677,52.923 ; R16.2 110.55,53.273 110.738,53.086 R12.1@110.871,53.086
ANT: C5.1 | length 3.3
  Top Layer w0.5: C5.1 129.882,49.811 130.798,48.895 132.715,48.895
BOOT0: DD1.35 R18.2 | length 2.4
  Top Layer w0.2: DD1.35@107.061,48.514 107.061,46.737 107.14,46.657 107.14,46.557 107.39,46.307 R18.2
CAN_H: CAN1.3 CAN-AP1.2 R17.2 U4.7 | length 19.4
  Top Layer w0.2: CAN-AP1.2@99.695,44.465 99.478,44.682 99.152,44.682 98.688,45.146 98.688,48.035 98.648,48.075 98.648,48.194 97.058,49.784 97.058,50.809 96.858,51.009 96.858,51.523 97.058,51.723 97.058,53.47 98.206,54.618 99.282,54.618 99.831,55.167 R17.2@99.831,55.717 ; R17.2 R17.2@99.831,55.717 ; CAN-AP1.2 100.428,44.282 101.844,44.282 102.246,43.881 102.246,43.55 102.731,43.065 v1(102.731,43.041) ; U4.7 100.229,56.115 R17.2@99.831,55.717
CAN_L: CAN1.4 CAN-AP1.3 R17.1 U4.6 | length 23.7
  Top Layer w0.2: v1(96.897,48.895) 96.992,48.99 96.992,49.156 97.007,49.17 96.488,49.689 96.488,53.423 98.053,54.988 98.733,54.988 98.95,55.206 98.95,56.436 99.481,56.967 99.481,57.067 99.731,57.317 R17.1 ; R17.1@99.822,57.277 99.972,57.277 100.483,56.765 U4.6
  Bottom Layer w0.2: v1(96.897,48.895) 96.897,48.181 96.535,47.819 96.535,47.206 97.448,46.293 97.448,46.144 98.767,44.825 98.916,44.825 100.234,43.507 100.234,43.411 100.338,43.307 100.457,43.307 101.746,44.596 CAN1.4
  other v1: 100.33,43.18
CAN_RXD: DD1.23 U4.4 | length 16.3
  Top Layer w0.25: v1(97.917,52.715) 97.917,51.739 98.123,51.533 98.123,50.786 98.363,50.546 101.2,50.546 101.586,50.931 101.68,50.931 101.76,51.011 101.771,51.011 102.068,51.308 DD1.23@102.616,51.308 ; U4.4 103.861,58.268 v1(103.886,58.293)
  Bottom Layer w0.25: v1(97.917,52.715) 98.532,53.33 98.946,53.33 99.812,54.196 99.812,54.623 103.396,58.207 103.8,58.207 v1(103.886,58.293)
CAN_TXD: DD1.24 U4.1 | length 16.4
  Top Layer w0.2: v1(97.478,51.266) 97.574,51.17 97.574,50.776 98.199,50.151 101.364,50.151 101.749,50.536 101.843,50.536 101.923,50.616 101.935,50.616 102.085,50.766 102.719,50.766 DD1.24 ; U4.1@103.886,55.499 103.92,55.465 104.44,55.465 104.63,55.656 v1(104.765,55.656)
  Bottom Layer w0.2: v1(97.478,51.266) 97.574,51.17 99.315,51.17 102.233,54.088 103.198,54.088 v1(104.765,55.656)
EN: DD1.9 R4.1 U2.7 | length 35.9
  Top Layer w0.25: DD1.9 108.707,53.296 108.712,53.301 v1(108.712,54.61) ; v1(115.443,55.372) 115.443,58.674 115.697,58.928 115.928,58.928 115.938,58.938 127.879,58.938 128.651,58.166 v1(128.651,55.499) ; U2.7 127.386,52.431 R4.1@128.135,51.681
  Bottom Layer w0.25: v1(108.712,54.61) 110.363,54.61 111.76,53.213 113.284,53.213 v1(115.443,55.372) ; v1(128.143,51.689) 128.651,52.197 v1(128.651,55.499)
FB: R23.1 R25.2 U6.5 | length 7.3
  Top Layer w0.3: R25.2 112.752,29.694 113.716,29.694 ; R23.1 115.216,28.194 113.716,29.694 ; U6.5@116.332,31.496 116.332,30.629 116.091,30.388 114.757,30.388 114.063,29.694 113.716,29.694
GND: C1.2 C2.2 C3.2 C4.2 C6.2 C7.1 C8.2 C9.2 C10.2 C11.2 C12.2 C13.2 C14.2 C15.2 C16.2 C17.2 C19.2 C20.2 C21.1 C22.1 C23.1 CAN1.5 CAN1.6 CAN1.P1 CAN1.P2 CAN-AP1.4 CAN-AP1.SH1 CAN-AP1.SH2 D1.C D2.C D3.C D4.A DD1.5 DD1.17 DD1.18 DD1.26 DD1.36 J1.6 J1.S1 J1.S2 R2.2 R9.2 R13.1 R16.1 R18.1 R22.1 R24.1 R25.1 SWD1.1 U1.2 U2.33 U3.4 U4.2 U4.8 U5.2 U6.7 U6.9 Y1.2 Y1.4 Y2.2 | length 247.4
  Top Layer w0.25: CAN-AP1.SH2@96.52,40.132 96.52,47.207 96.895,47.582 CAN-AP1.SH1 97.112,47.498 v1(97.155,47.498) ; CAN-AP1.SH2@97.028,40.259 CAN-AP1.SH2@97.155,40.132 ; CAN-AP1.SH2@97.917,40.132 98.253,39.796 98.253,38.394 98.679,37.968 v1(98.679,37.846) ; C11.2 98.216,55.753 v1(98.298,55.753) ; SWD1.1 98.141,32.288 97.155,33.274 CAN-AP1.SH2@97.155,40.132 ; CAN-AP1.4@100.203,42.037 99.733,42.037 99.503,41.807 99.503,41.757 97.878,40.132 CAN-AP1.SH2@97.155,40.132 ; v1(100.203,47.752) 100.203,47.813 101.914,49.524 101.914,49.549 102.087,49.721 102.264,49.721 102.339,49.796 DD1.26 ; U4.8@101.136,55.465 102.328,55.465 U4.8@102.616,55.753 ; U4.8@102.489,55.753 U4.8@102.616,55.753 ; v1(102.489,56.388) 102.489,56.431 U4.8@102.498,56.44 ; U4.8@102.508,56.115 U4.2 ; U4.8@102.743,55.88 U4.8@102.616,55.753 ; DD1.26@102.87,49.784 104.052,49.784 DD1.36@105.564,51.296 ; U4.2@103.886,56.037 104.149,56.301 105.182,56.301 105.691,55.792 C10.2 ; DD1.17@104.013,53.848 104.013,52.848 DD1.36@105.564,51.296 ; DD1.17 DD1.18 103.564,54.521 103.123,54.962 103.123,55.34 102.711,55.753 U4.8@102.616,55.753 ; C17.2 105.264,40.063 105.866,40.063 106.305,39.624 v1@106.812,39.624 ; C10.2@105.664,55.88 105.851,56.067 106.228,56.067 107.39,57.229 R13.1 v1(107.442,57.277) ; C19.2 107.1,28.194 R24.1@110.998,28.194 ; v1(107.24,44.981) 107.414,44.807 C14.2@109.196,44.807 ; DD1.36@107.559,48.481 107.559,49.029 107.544,49.044 107.544,49.316 DD1.36@105.564,51.296 ; DD1.36@107.564,48.481 107.564,48.071 108.077,47.559 v1(108.077,47.244) ; DD1.5@108.077,51.308 108.065,51.296 DD1.36@105.564,51.296 ; R24.1 110.661,28.15 R25.1@112.351,28.15 ; v1(111.125,40.386) 111.125,41.184 113.721,43.78 113.742,43.78 114.362,44.4 C3.2 114.362,44.5 115.087,45.225 115.087,47.027 115.57,47.51 D1.C@115.57,47.879 ; v1(112.268,51.689) 112.277,51.68 C12.2 ; R25.1 v1(112.649,28.194) ; U6.9@113.919,34.036 113.931,34.048 U6.7 ; C6.2 114.8,49.256 115.537,48.519 115.537,48.027 D1.C 116.565,47.752 116.922,47.395 117.832,47.395 Y1.4@118.237,46.99 ; C4.2@115.062,53.213 115.376,53.527 115.376,54.355 D2.C 116.205,57.47 v1(116.205,58.293) ; U1.2@115.189,40.513 115.216,40.486 115.216,39.531 115.912,38.835 C1.2 115.951,38.735 v1(115.974,38.712) ; v1(120.015,38.862) 120.481,38.862 123.522,35.821 123.522,35.569 123.912,35.179 D4.A@124.46,35.179 ; Y1.2@122.88,44.577 v1(128.016,44.577) C8.2 ; v1(122.936,50.673) 123.063,50.673 U2.33 124.714,52.324 v1(124.968,52.324) ; R9.2@124.079,57.785 124.187,57.677 125.503,57.677 C2.2 125.703,57.777 126.219,58.293 v1(126.238,58.293) ; D4.A 124.497,34.594 125.472,35.569 126.436,35.569 127.189,36.322 C22.1@127.381,36.322 ; C21.1 127.728,28.857 128.293,29.422 128.293,30.363 128.713,30.783 128.713,35.182 127.635,36.26 127.635,36.328 129.54,38.233 v1(129.54,40.894)
  Bottom Layer w0.25: v1(97.155,47.498) 97.155,47.62 97.542,48.006 97.542,49.536 CAN1.P2@97.917,49.911 ; v1(98.679,37.846) CAN1.P1 ; v1(98.679,53.975) 98.298,54.356 v1(98.298,55.753) 99.822,55.753 103.007,58.938 104.415,58.938 104.826,58.528 104.826,58.32 103.755,57.25 103.351,57.25 v1(102.489,56.388) ; CAN1.P2@100.076,49.657 CAN1.P2@100.203,49.53 ; v1(100.203,47.752) CAN1.6@103.505,47.752 ; v1(100.33,51.308) 100.33,50.038 100.203,49.911 CAN1.P2@100.203,49.53 ; CAN1.5@103.759,45.974 103.759,47.341 CAN1.6 ; v1@106.911,39.52 106.911,42.141 107.75,42.98 108.531,42.98 v1(111.125,40.386) ; v1@107.061,39.243 v1(107.061,36.195) 113.411,36.195 ; v1(107.24,44.981) 107.362,44.981 107.696,45.316 107.754,45.316 108.077,45.639 v1(108.077,47.244) 107.128,47.244 105.224,49.148 103.537,49.148 103.409,49.276 100.457,49.276 CAN1.P2@100.203,49.53 ; v1@107.332,39.348 v1(108.942,39.348) ; v1(107.442,57.277) 108.087,57.922 109.718,57.922 v1@110.299,57.34 ; v1@108.866,44.923 110.143,46.199 110.143,46.516 v1(111.506,47.879) ; v1@110.236,57.277 110.236,57.15 108.067,54.981 108.067,54.343 109.15,53.26 110.697,53.26 v1(112.268,51.689) ; v1(110.363,57.277) 112.05,55.59 112.05,54.437 v1@111.969,54.356 ; v1(112.05,54.229) 114.712,56.891 115.808,56.891 J1.S1@116.078,57.161 ; v1@112.649,28.067 112.712,28.13 116.776,28.13 v1(116.84,28.067) ; v1(112.649,28.194) 112.649,28.316 113.054,28.721 113.054,31.853 U6.9@113.03,31.877 ; U6.9@113.054,34.913 113.054,35.838 113.411,36.195 ; 113.538,36.322 113.411,36.195 ; 113.561,36.299 v1(115.974,38.712) 119.865,38.712 v1(120.015,38.862) ; v1(116.205,58.293) 126.006,58.293 J1.S2 ; J1.6@118.11,54.864 118.11,54.189 119.492,52.807 120.802,52.807 v1(122.936,50.673) ; v1(124.968,52.324) 127.01,54.366 127.01,55.493 126.508,55.995 126.508,57.896 J1.S2@126.365,58.039 ; v1(128.016,44.577) 129.54,43.053 v1(129.54,40.894)
  other v1: 97.79,27.94 99.06,27.94 100.33,27.94 101.6,27.94 102.87,27.94 104.14,27.94 105.41,27.94 106.68,27.94 107.95,27.94 109.22,27.94 110.49,27.94 111.76,27.94 114.3,27.94 121.92,27.94 127,27.94 128.27,27.94 129.54,27.94 97.155,29.21 98.425,29.21 99.695,29.21 100.965,29.21 102.235,29.21 103.505,29.21 104.775,29.21 106.045,29.21 107.315,29.21 108.585,29.21 126.365,29.21 127.635,29.21 128.905,29.21 130.175,29.21 96.52,30.48 97.79,30.48 99.06,30.48 100.33,30.48 101.6,30.48 102.87,30.48 104.14,30.48 105.41,30.48 109.22,30.48 121.92,30.48 129.54,30.48 97.155,31.75 98.425,31.75 100.965,31.75 102.235,31.75 103.505,31.75 104.775,31.75 108.585,31.75 121.285,31.75 130.175,31.75 96.52,33.02 97.79,33.02 102.87,33.02 104.14,33.02 105.41,33.02 124.46,33.02 125.73,33.02 129.54,33.02 97.155,34.29 98.425,34.29 103.505,34.29 108.585,34.29 117.475,34.29 121.285,34.29 123.825,34.29 125.095,34.29 128.905,34.29 130.175,34.29 96.52,35.56 97.79,35.56 101.6,35.56 107.95,35.56 124.46,35.56 125.73,35.56 128.27,35.56 129.54,35.56 97.155,36.83 109.855,36.83 111.125,36.83 117.475,36.83 123.825,36.83 125.095,36.83 126.365,36.83 128.905,36.83 130.175,36.83 96.52,38.1 97.79,38.1 115.57,38.1 116.84,38.1 120.65,38.1 121.92,38.1 123.19,38.1 124.46,38.1 129.54,38.1 97.155,39.37 98.425,39.37 118.745,39.37 130.175,39.37 107.061,39.497 96.52,40.64 97.79,40.64 99.06,40.64 100.33,40.64 113.03,40.64 118.11,40.64 97.155,41.91 98.425,41.91 99.695,41.91 111.125,41.91 112.395,41.91 117.475,41.91 96.52,43.18 97.79,43.18 111.76,43.18 113.03,43.18 97.155,44.45 113.665,44.45 123.825,44.45 126.365,44.45 108.966,44.704 96.52,45.72 107.95,48.26 104.775,52.07 106.045,52.07 130.175,54.61 96.52,55.88 129.54,55.88 113.665,57.15 116.205,57.15 127.635,57.15 130.175,57.15 97.79,58.42 105.41,58.42 111.76,58.42 113.03,58.42 114.3,58.42 129.54,58.42
GPIO0: J1.4 R6.2 U2.15 | length 4.2
  Top Layer w0.25: R6.2@120.955,55.952 120.955,55.852 122.311,54.496 U2.15@122.311,53.645
  Bottom Layer w0.25: J1.4 120.65,54.933 v1(120.65,56.134)
GPIO2: R7.2 U2.14 | length 2.8
  Top Layer w0.25: R7.2 122.271,55.452 122.809,54.914 U2.14@122.809,53.594
GPIO4: R8.1 U2.16 | length 4.1
  Top Layer w0.25: R8.1 119.089,56.177 120.91,54.356 121.647,54.356 121.793,54.21 U2.16@121.793,53.721
GPIO5: U2.24
GPIO12: U2.10
GPIO13: U2.12
GPIO14: U2.9
GPIO15: R9.1 U2.13 | length 2.8
  Top Layer w0.25: U2.13@123.317,53.594 123.321,53.598 U2.13 123.321,54.628 123.912,55.219 R9.1
GPIO16: DD1.29 R5.1 U2.8 | length 40.8
  Top Layer w0.25: DD1.29 104.064,45.849 104.287,45.626 107.686,45.626 107.719,45.593 v1(110.744,45.593) ; v1(113.293,54.347) 113.833,53.807 113.833,53.685 114.232,53.287 114.232,52.856 114.119,52.744 114.119,52.006 v1(114.148,51.977) ; U2.8 127.988,52.931 R5.1@128.143,53.086 ; v1(126.365,54.864) 126.604,54.864 128.155,53.313 R5.1
  Bottom Layer w0.25: v1(110.744,45.593) 114.582,49.431 114.582,50.987 114.205,51.364 114.205,51.92 v1(114.148,51.977) ; v1(113.293,54.347) 115.417,56.471 116.805,56.471 116.978,56.644 116.978,56.804 117.793,57.619 123.61,57.619 v1(126.365,54.864)
LED: DD1.20 R20.1 | length 2.9
  Top Layer w0.25: R20.1@100.366,52.288 100.366,52.388 100.741,52.763 100.883,52.763 101.206,53.086 101.847,53.086 102.101,52.832 DD1.20@102.743,52.832
MISO/ADC_VC: DD1.13
MOSI/ADC_MID: DD1.14
NetC5_2: C5.2 U2.2 | length 2.1
  Top Layer w0.25: U2.2 127.086,49.931 127.107,49.911 C5.2@128.143,49.911
NetC7_2: C7.2 U2.28 Y1.1 | length 9.6
  Top Layer w0.25: Y1.1 118.823,44.52 120.328,46.025 123.718,46.025 ; U2.28 123.331,48.721 123.331,48.029 123.718,47.642 123.718,46.101 C7.2@124.704,46.101
NetC18_1: C18.1 D4.C L1.2 U6.8 | length 11.2
  Top Layer w1: C18.1 115.794,36.809 U6.8@115.794,35.518 ; U6.8@115.824,35.56 118.581,35.56 118.947,35.194 118.997,35.194 119.597,34.594 D4.C ; D4.C@119.126,34.925 119.489,34.562 119.489,29.7 L1.2
NetC18_2: C18.2 U6.1 | length 3.1
  Top Layer w0.4: U6.1@111.506,35.433 113.018,36.945 C18.2
NetC23_2: C23.2 U6.6 | length 5
  Top Layer w0.4: U6.6@116.332,32.766 117.622,32.766 117.856,32.532 117.856,30.603 116.86,29.607 C23.2
NetD1_A: D1.A R1.1 | length 1.7
  Top Layer w0.3: D1.A 114.312,46.216 R1.1@114.427,46.101
NetD2_A: D2.A R8.2 | length 1.8
  Top Layer w0.25: D2.A 117.498,57.677 118.891,57.677 R8.2@118.999,57.785
NetD3_A: D3.A R20.2 | length 1.3
  Top Layer w0.25: D3.A 98.818,52.463 R20.2@98.933,52.578
NetR2_1: R2.1 U2.31 | length 3.1
  Top Layer w0.25: U2.31 124.821,47.985 124.901,47.905 124.901,47.86 125.404,47.357 R2.1@126.469,46.292
NetR10_1: R10.1 U2.21 | length 4.6
  Top Layer w0.25: R10.1@116.761,51.435 117.452,51.435 117.843,51.044 118.89,51.044 119.175,50.76 119.971,50.76 120.143,50.931 U2.21@121.027,50.931
NetR24_2: R24.2 U6.4 | length 2.4
  Top Layer w0.3: R24.2@110.49,29.591 110.701,29.591 111.329,30.219 U6.4
NRST: C8.1 J1.5 R3.1 U2.32 | length 18.7
  Top Layer w0.25: U2.32 125.321,48.034 125.578,47.777 126.213,47.777 C8.1@127.676,46.314 ; C8.1 C8.1@128.066,46.089 ; v1(128.016,46.111) 128.016,46.101 R3.1@129.68,46.101
  Bottom Layer w0.25: J1.5 119.283,54.266 119.878,53.671 120.954,53.671 128.016,46.609 v1(128.016,46.111) v1@128.016,45.847
NSS/ADC_VA: DD1.11
OSC_IN: DD1.2 Y2.1 | length 4.4
  Top Layer w0.25: DD1.2 108.384,49.791 108.971,49.791 109.214,49.549 109.214,48.265 109.484,47.995 109.484,47.266 110.141,46.609 Y2.1@110.236,46.609
OSC_OUT: DD1.3 Y2.3 | length 2.9
  Top Layer w0.25: DD1.3@108.585,50.371 108.985,50.371 109.634,49.723 109.634,49.516 110.071,49.079 Y2.3
PWM2B: DD1.30
PWM3A: DD1.31
PWM3B: DD1.32
PWM3C: DD1.15
RX: DD1.22 J1.3 U2.26 | length 40.6
  Top Layer w0.25: v1(101.382,51.543) 101.504,51.543 101.776,51.816 DD1.22@102.616,51.816 ; v1(113.751,49.657) 113.792,49.657 114.298,50.163 116.948,50.163 117.094,50.017 117.094,48.311 117.24,48.165 119.69,48.165 119.819,48.036 122.066,48.036 122.311,48.281 122.311,48.721 U2.26
  Bottom Layer w0.25: v1(101.382,51.543) 101.468,51.457 101.822,51.457 103.711,49.568 112.582,49.568 112.671,49.657 113.561,49.657 113.561,49.678 113.65,49.678 114.162,50.19 114.162,50.813 113.503,51.472 113.503,52.244 115.233,53.974 115.709,53.974 117.438,55.703 117.438,55.788 117.611,55.961 119.166,55.961 119.984,56.779 121.275,56.779 121.783,56.271 J1.3
RXD0: DD1.21 J1.2 U2.25 | length 40
  Top Layer w0.25: v1(101.473,52.441) 101.595,52.441 101.739,52.296 DD1.21@102.541,52.296 ; v1(113.517,50.546) 113.554,50.583 117.583,50.583 117.729,50.437 117.729,48.877 117.975,48.631 120.666,48.631 120.766,48.731 U2.25
  Bottom Layer w0.25: v1(101.473,52.441) 101.483,52.441 103.632,50.292 109.038,50.292 109.342,49.988 112.408,49.988 112.497,50.077 112.982,50.077 113.451,50.546 113.538,50.546 113.538,50.647 113.083,51.102 113.083,52.418 115.059,54.394 115.535,54.394 117.018,55.877 117.018,55.962 117.437,56.381 118.992,56.381 119.81,57.199 121.449,57.199 122.203,56.445 122.203,56.196 123.033,55.366 J1.2
SCK/ADC_VB: DD1.12
SCL/PWM4A: DD1.33 R14.1 | length 2.8
  Top Layer w0.25: R14.1 104.923,46.307 105.596,46.98 105.596,47.426 106.045,47.875 DD1.33@106.045,48.514
SD_CLK: R10.2 U3.6 | length 20.6
  Top Layer w0.25: v1(125.603,40.005) 125.73,40.132 U3.6
  Bottom Layer w0.25: v1(115.553,51.496) 116.469,50.58 116.469,44.186 118.364,42.291 118.364,42.268 121.145,39.487 123.054,39.487 123.572,40.005 v1(125.603,40.005)
SD_CMD: U2.20 U3.1 | length 12.6
  Top Layer w0.25: v1(119.534,51.453) 119.546,51.441 121.112,51.441 U2.20@121.132,51.421 ; U3.1 v1(121.412,42.672)
  Bottom Layer w0.25: v1(119.534,51.453) 119.534,51.407 120.314,50.627 120.314,49.762 120.533,49.543 120.533,43.551 v1(121.412,42.672)
SD_D0: U2.22 U3.2 | length 13.2
  Top Layer w0.25: v1(119.656,50.115) 119.696,50.154 120.31,50.154 120.577,50.421 U2.22@121.158,50.421 ; U3.2 119.976,41.392 121.402,41.392 v1(121.412,41.382)
  Bottom Layer w0.25: v1(119.656,50.115) 119.656,50.055 118.999,49.398 118.999,43.579 120.971,41.607 121.065,41.607 121.29,41.382 v1(121.412,41.382)
SD_D1: U2.23 U3.5 | length 18.2
  Top Layer w0.25: v1(119.888,49.276) 120.026,49.276 120.671,49.921 121.111,49.921 U2.23 ; v1(125.73,38.862) U3.5
  Bottom Layer w0.25: v1(119.888,49.276) 119.888,43.284 121.145,42.027 122.675,42.027 123.945,40.757 125.763,40.757 126.248,40.272 126.248,39.38 v1(125.73,38.862)
SD_D2: U2.18 U3.7 | length 18.5
  Top Layer w0.25: v1(118.643,52.387) 118.764,52.387 119.076,52.699 120.342,52.699 120.513,52.528 120.61,52.528 U2.18@120.777,52.361 ; v1(125.603,41.402) U3.7
  Bottom Layer w0.25: v1(118.643,52.387) 119.757,52.387 122.829,49.314 122.829,44.176 v1(125.603,41.402)
SD_D3: U2.19 U3.3 | length 17.7
  Top Layer w0.25: v1(118.11,51.689) 118.857,51.689 119.287,52.119 119.543,52.119 119.563,52.14 119.724,52.14 119.814,52.05 119.85,52.05 119.968,51.931 U2.19 ; U3.3 v1(121.412,40.132)
  Bottom Layer w0.25: v1(118.11,51.689) 118.11,43.434 v1(121.412,40.132)
SDA/PWM4B: DD1.34 R15.1 | length 2.5
  Top Layer w0.25: R15.1 106.32,46.307 106.545,46.532 106.545,46.632 106.553,46.64 DD1.34@106.553,48.641
STM_NRST: DD1.4 R19.2 | length 2.4
  Top Layer w0.25: DD1.4@108.458,50.8 108.462,50.796 109.414,50.796 109.827,50.383 R19.2
SWDIO: DD1.25 SWD1.3 | length 23
  Top Layer w0.25: v1(98.068,46.401) 98.044,46.377 98.044,45.099 99.256,43.887 101.382,43.887 101.6,43.669 101.6,40.934 99.324,38.658 99.324,37.218 98.979,36.873 98.979,35.433 99.624,34.788 SWD1.3 ; v1(99.247,48.352) 99.315,48.42 100.192,48.42 101.913,50.141 102.007,50.141 102.087,50.221 102.099,50.221 102.169,50.291 102.744,50.291 DD1.25
  Bottom Layer w0.25: v1@98.044,46.482 98.149,46.482 99.173,47.506 99.173,48.278 v1(99.247,48.352) ; v1(98.068,46.401) v1@98.097,46.429
SWLK: DD1.28 SWD1.2 | length 21.5
  Top Layer w0.18: SWD1.2 101.61,33.538 v1(105.537,37.465) ; v1(102.87,48.616) 103.607,48.616 DD1.28@103.632,48.641
  Bottom Layer w0.18: v1(102.87,48.616) 102.972,48.514 105.314,48.514 105.624,48.204 105.624,37.552 v1(105.537,37.465)
VERSION: DD1.16 R11.1 R13.2 | length 5.5
  Top Layer w0.25: DD1.16@104.521,53.975 104.521,54.655 104.888,55.022 106.683,55.022 107.39,55.729 R13.2 ; R13.2@107.442,55.626 107.545,55.729 R11.1
Vin: C19.1 C20.1 CAN1.1 CAN1.2 R12.2 U6.2 | length 38.1
  Top Layer w0.3: U6.2@110.49,34.036 110.49,34.419 108.585,36.324 108.585,37.211 108.225,37.571 108.225,40.84 113.531,46.146 113.531,48.929 113.081,49.379 113.081,50.035 112.847,50.268 112.847,50.824 112.997,50.974 112.997,52.286 112.66,52.623 112.377,52.623 112.177,52.823 R12.2@112.177,52.923
  Top Layer w1: C19.1 C20.1@107.061,32.893 ; C20.1@107.061,33.186 109.344,33.186 110.194,34.036 U6.2@110.49,34.036
  Bottom Layer w1: CAN1.2 CAN1.1 104.014,36.194 v1(107.061,33.147)
XTAL_OUT: C6.1 U2.27 Y1.3 | length 8.7
  Top Layer w0.18: C6.1@116.574,49.022 116.695,48.901 116.695,48.166 117.081,47.78 119.531,47.78 119.66,47.651 121.492,47.651 Y1.3@122.174,46.969 ; Y1.3@122.682,46.99 122.821,47.129 U2.27
pads on no net: U1.4 U2.5 U5.4 U6.3

## Polygon pours and split planes (outlines as drawn)
no net on Top Solder "NONET_L01_P021" (solid, pour order 21): 138.835,49.149 138.835,47.498 135.025,47.498 135.025,46.863 138.835,46.863 138.835,45.212 135.025,45.212 135.025,44.577 138.835,44.577 138.835,42.926 135.025,42.926 135.025,42.291 138.835,42.291 138.835,38.1 138.327,38.1 138.327,41.783 134.517,41.783 134.517,43.434 138.327,43.434 138.327,44.069 134.517,44.069 134.517,45.72 138.327,45.72 138.327,46.355 134.517,46.355 134.517,48.006 138.327,48.006 138.327,48.641 132.993,48.641 132.993,41.707 132.485,41.707 132.485,48.641 131.723,48.641 131.723,49.149
GND on Top Layer "GND_L01_P022" (solid, remove dead copper, pour order 22): 130.81,63.242 130.81,26.67 129.413,25.273 93.98,25.273 93.98,59.563 97.282,62.865 97.409,62.738 102.362,62.738 103.378,63.754 113.284,63.754
ANT on Top Layer "ANT_L01_P014" (solid, pour order 14): 138.811,49.149 138.811,47.498 135.001,47.498 135.001,46.863 138.811,46.863 138.811,45.212 135.001,45.212 135.001,44.577 138.811,44.577 138.811,42.926 135.001,42.926 135.001,42.291 138.811,42.291 138.811,38.1 138.303,38.1 138.303,41.783 134.493,41.783 134.493,43.434 138.303,43.434 138.303,44.069 134.493,44.069 134.493,45.72 138.303,45.72 138.303,46.355 134.493,46.355 134.493,48.006 138.303,48.006 138.303,48.641 132.969,48.641 132.969,41.707 132.461,41.707 132.461,48.641 131.699,48.641 131.699,49.149
GND on Bottom Layer "GND_L02_P023" (solid, remove dead copper, pour order 23): 130.852,63.242 130.852,26.67 129.455,25.273 94.022,25.273 94.022,59.563 97.324,62.865 97.451,62.738 102.404,62.738 103.42,63.754 113.326,63.754

## Silkscreen, mask and mechanical layers (free items; w line width, h text height)
Top Overlay:
  lines w0.254: 131.219,27.63 cw(c134.6,30.6) 138.588,32.684 ; 131.301,59.36 ccw(c134.6,56.3) 138.639,54.316 ; 132.222,28.032 cw(c134.6,30.6) 136.675,27.782 ; 132.717,59.25 ccw(c134.6,56.3) 136.545,59.21
  text "3V3 / SWDIO / SWCLK / GND" at 101.854,31.877 h0.7
Bottom Overlay:
  region: 124.333,48.029 cw(c127.118,48.55) 128.019,51.236 ccw(c128.236,47.266)
  region: 124.682,46.004 cw(c127.626,45.941) 125.223,47.643 ccw(c124.267,45.533) 122.588,47.13 cw(c122.665,44.762)
  region: 129.496,44.632 ccw(c127.833,48.598) 130.358,45.117 ccw(c128.151,47.757) 129.839,50.756 cw(c127.252,47.829)
  region: 129.608,46.944 ccw(c126.684,47.47) 127.255,50.385 cw(c125.176,50.916) 126.791,49.504 cw(c126.945,46.844)
  region: 126.245,44.602 cw(c127.833,48.598) 125.439,45.026 cw(c129.755,45.905) 125.653,47.509 ccw(c127.852,50.38) 126.146,47.192 ccw(c129.532,46.024)
  region: 129.015,44.464 cw(c127.833,48.598) 128.426,44.339 cw(c130.46,46.043) 127.906,46.765 ccw(c127.852,50.38) 128.525,46.827 ccw(c131.228,46.156)
  region: 125.76,48.852 ccw(c125.176,50.916) 126.527,49.249 126.527,48.293
  region: 129.544,50.871 129.663,51.515 ccw(c129.665,51.52) 129.67,51.52 ccw(c129.159,51.562) 128.646,51.562 ccw(c128.651,51.562) 128.646,51.562 ccw(c129.159,51.562) 128.646,51.552 128.646,51.562 cw(c129.159,51.562) 128.646,51.562 128.646,51.552 128.65,51.169 cw(c128.655,51.169) 128.65,51.169 ccw(c128.655,51.169) 128.654,51.164 129.537,50.867 ccw(c129.539,50.872)
  region: 127.819,44.298 cw(c127.833,48.598) 127.192,44.346 cw(c129.863,46.274) 126.643,46.972 ccw(c127.852,50.38) 127.248,46.815 ccw(c130.338,46.193)
  lines w0.01: 128.651,51.562 128.655,51.169 129.539,50.872 ; 128.654,51.512 cw(c129.159,51.562) 129.665,51.52 ; 135.417,51.091 135.545,51.78
  lines w0.127: 122.588,47.13 cw(c124.267,45.533) 125.223,47.643 ccw(c127.626,45.941) 124.682,46.004 ccw(c122.665,44.762) 122.588,47.13 ; 124.333,48.029 cw(c128.236,47.266) 128.019,51.236 ccw(c127.118,48.55) 124.333,48.029 ; 125.439,45.026 ccw(c127.833,48.598) 126.245,44.602 cw(c129.532,46.024) 126.146,47.192 cw(c127.852,50.38) 125.653,47.509 ccw(c129.755,45.905) 125.439,45.026 ; 125.76,48.852 ccw(c125.176,50.916) 126.527,49.249 126.527,48.293 125.76,48.852 ; 126.643,46.972 ccw(c129.863,46.274) 127.192,44.346 ccw(c127.833,48.598) 127.819,44.298 cw(c130.338,46.193) 127.248,46.815 cw(c127.852,50.38) 126.643,46.972 ; 126.791,49.504 cw(c126.945,46.844) 129.608,46.944 ccw(c126.684,47.47) 127.255,50.385 cw(c125.176,50.916) 126.791,49.504 ; 127.906,46.765 ccw(c130.46,46.043) 128.426,44.339 ccw(c127.833,48.598) 129.015,44.464 cw(c131.228,46.156) 128.525,46.827 cw(c127.852,50.38) 127.906,46.765 ; 129.496,44.632 ccw(c127.252,47.829) 129.839,50.756 cw(c128.151,47.757) 130.358,45.117 cw(c127.833,48.598) 129.496,44.632